# Altium PCB PCB-v1.PcbDoc
Units mm, origin at the board's own origin, x right, y up, seen from the top; angles counter-clockwise.
Board outline 100 x 100 mm, 2 copper layers (Top Layer, Bottom Layer); 9 components, 4 nets, 15 pads, 0 vias.
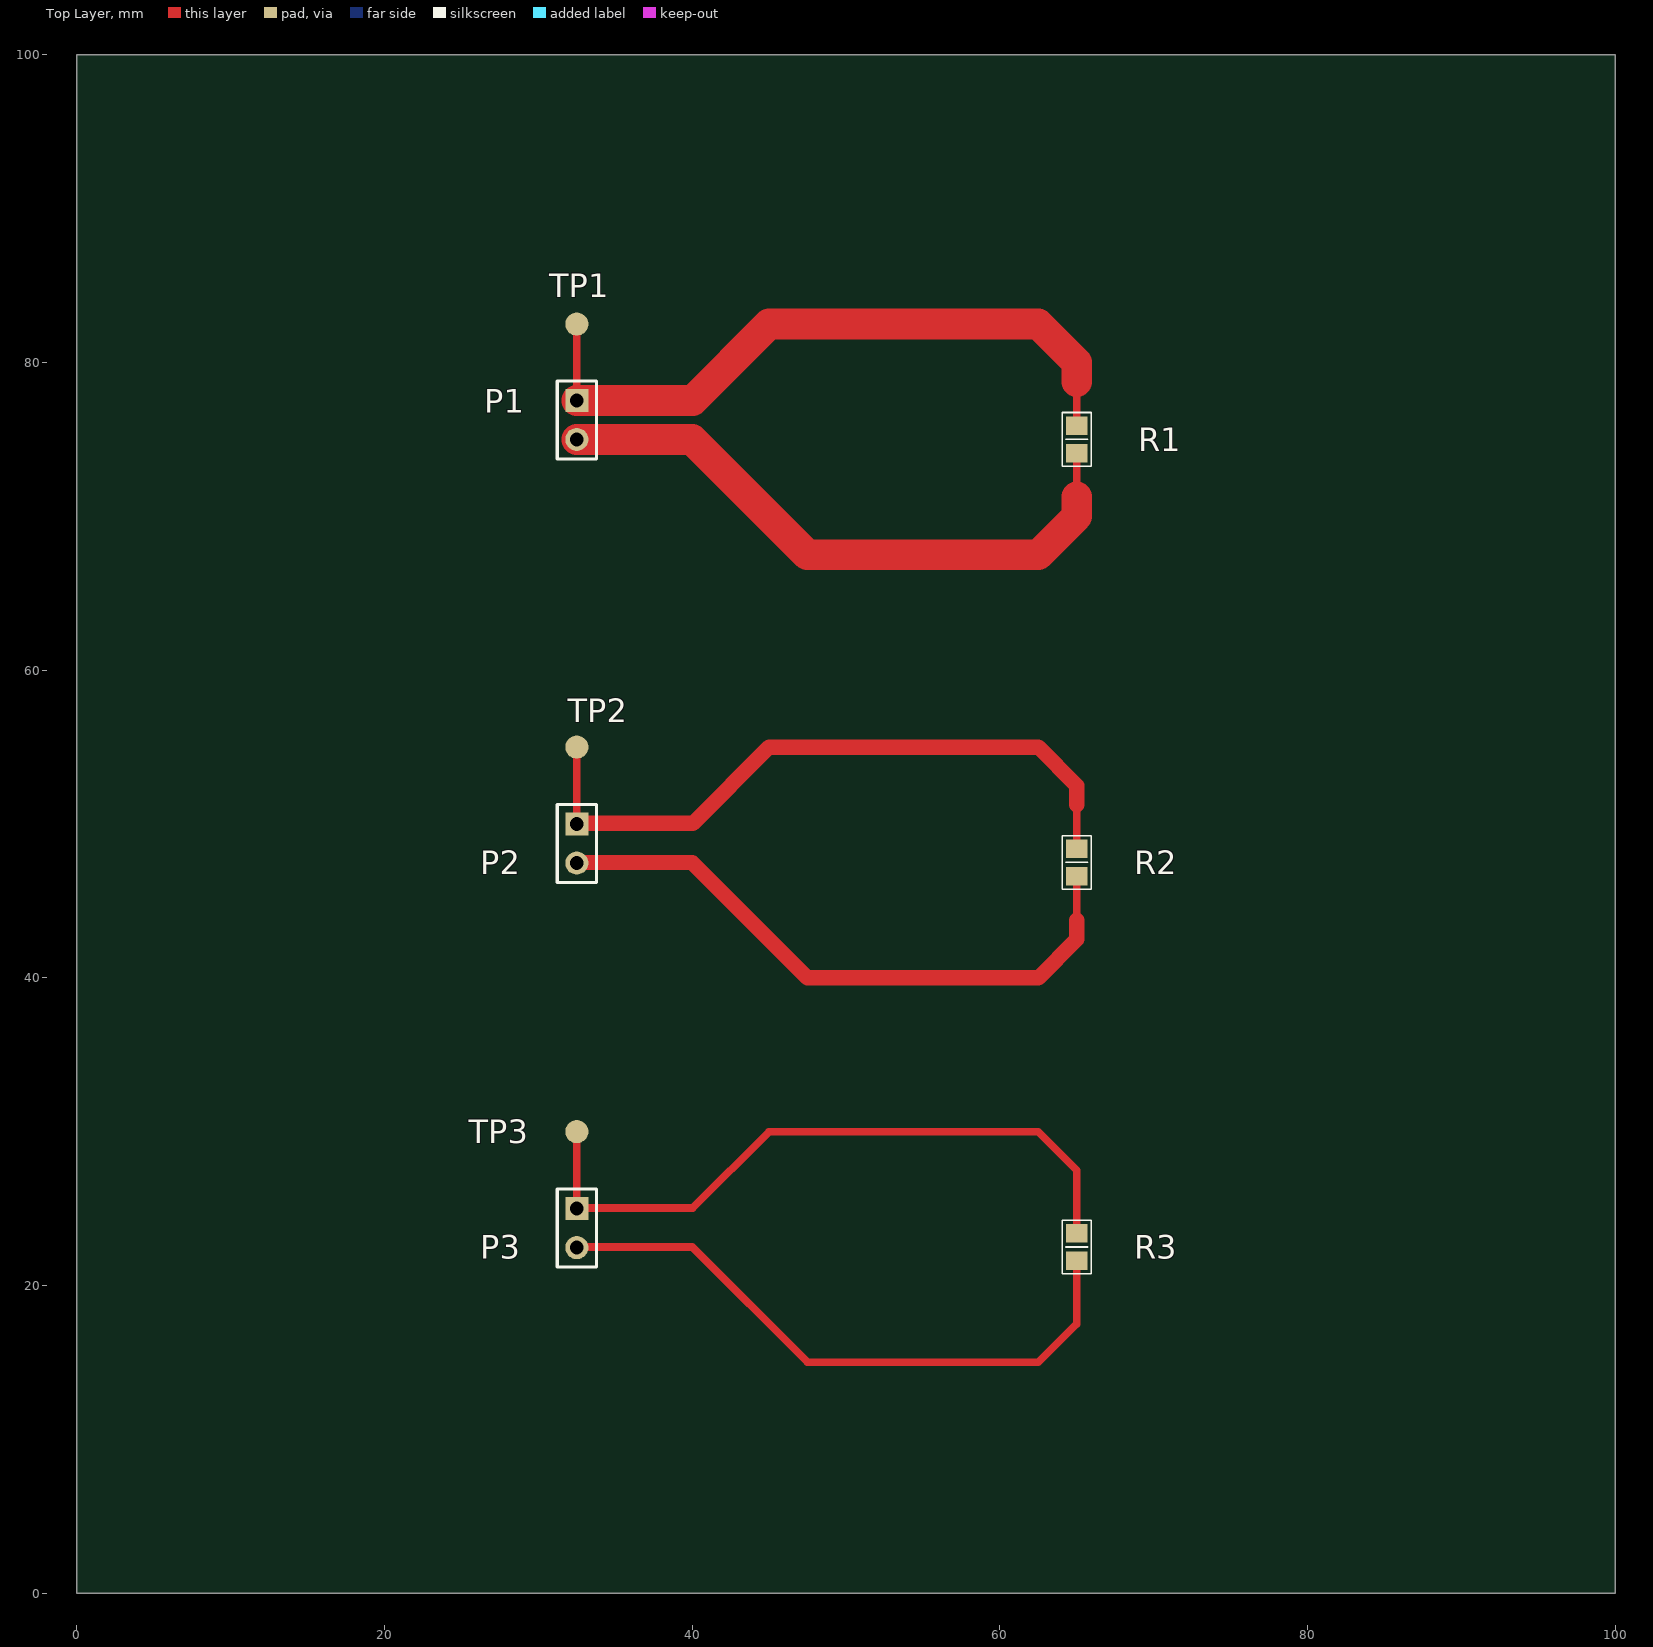
[diagram p0: Top Layer view]
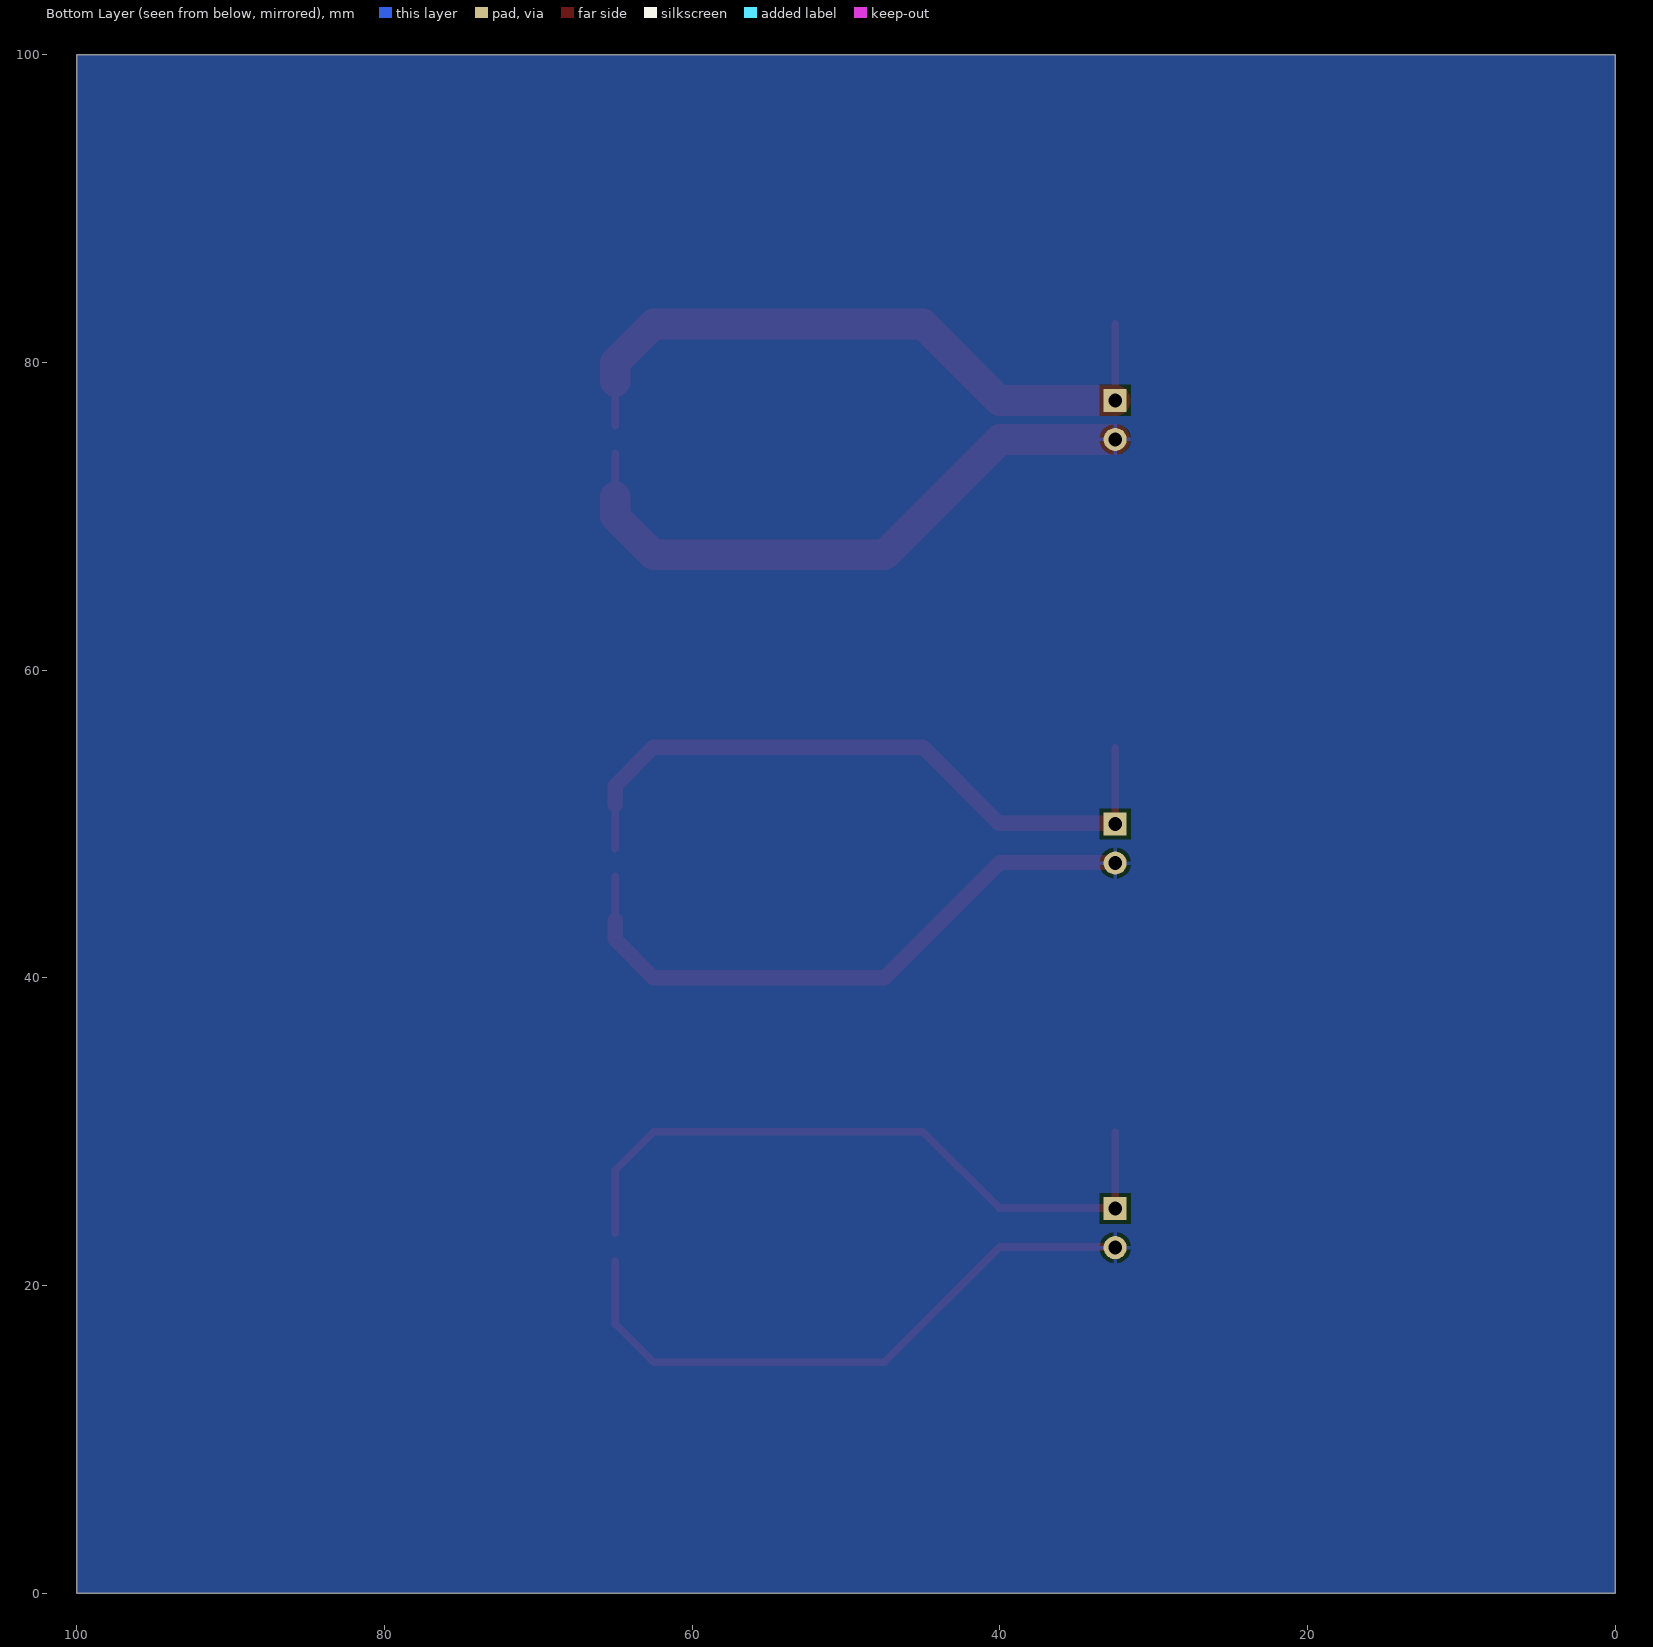
[diagram p1: Bottom Layer view, seen from below]
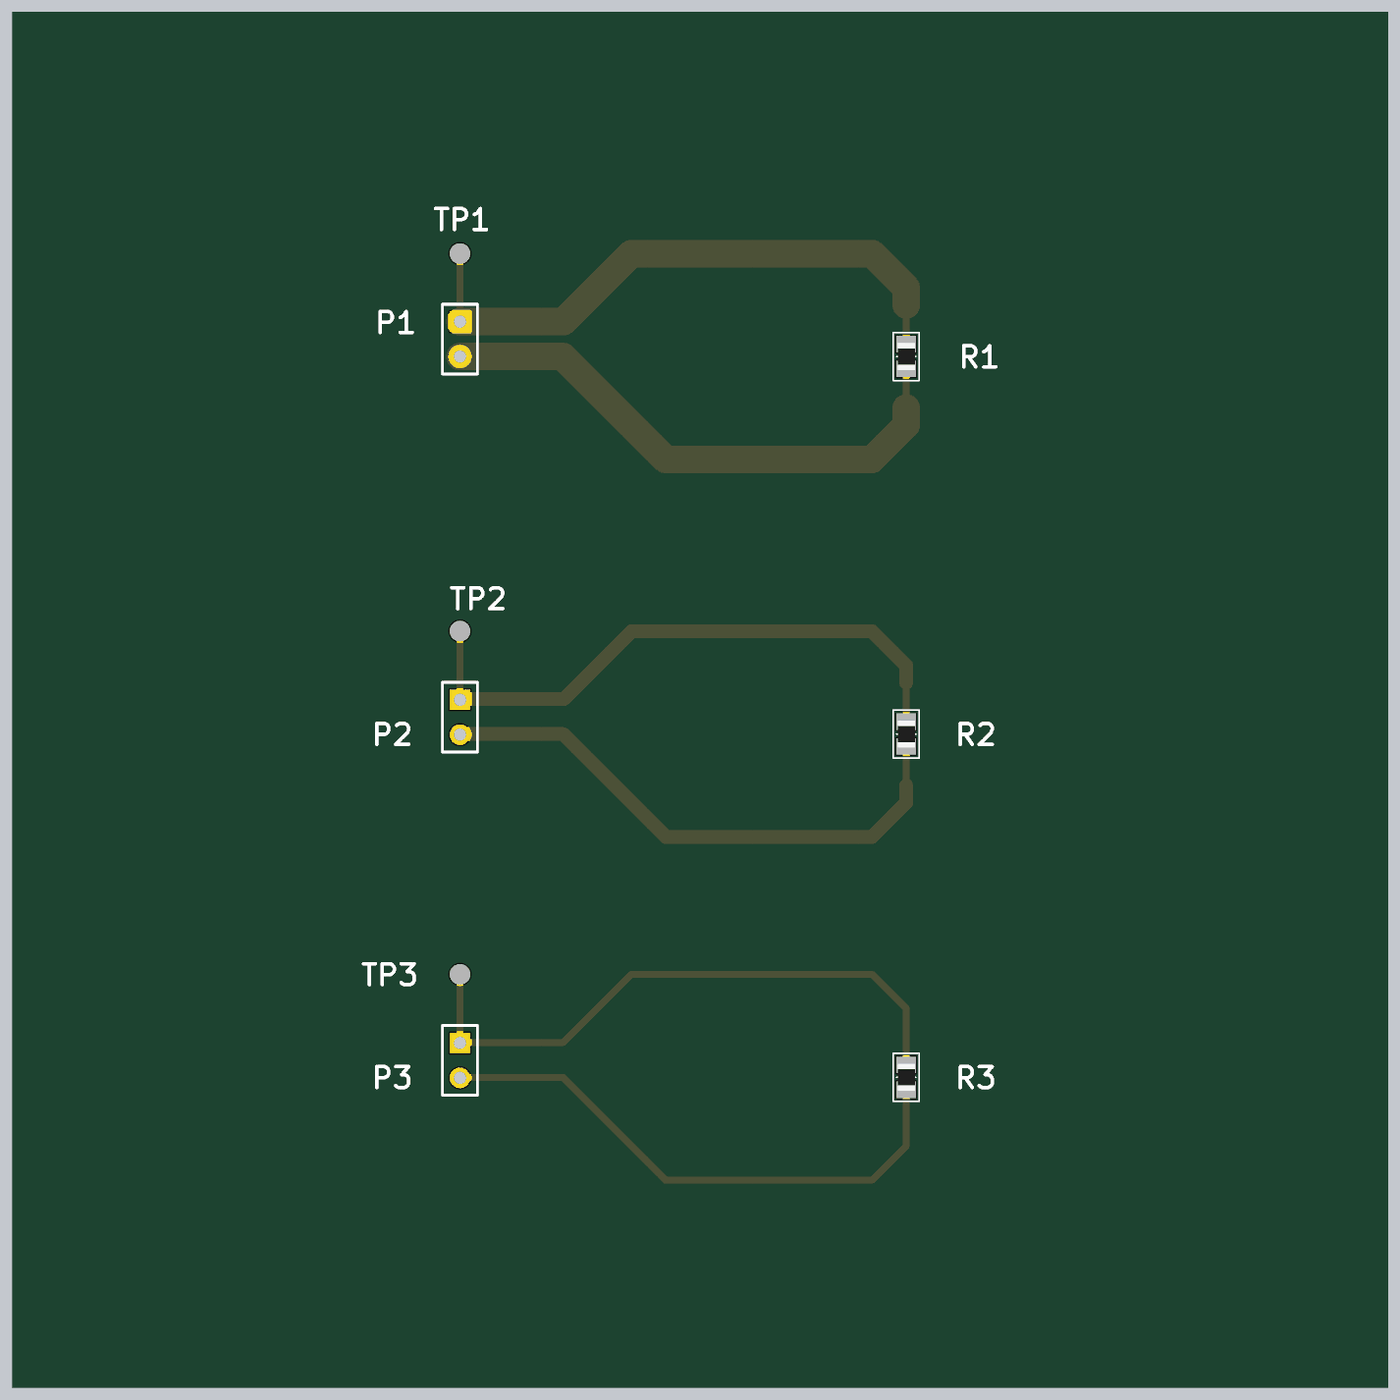
[diagram p2: 3D render of the assembled board from above, using the file's embedded part models]

## Layer stack, top to bottom
Top Solder: solder mask 0.0102, Solder Resist, Dk 3.5
Top Layer: signal copper 0.0356
Dielectric 1: dielectric 0.32, FR-4, Dk 4.8
Bottom Layer: signal copper 0.0356
Bottom Solder: solder mask 0.0102, Solder Resist, Dk 3.5

## Board outline
0,0 100,0 100,100 0,100

## Design rules (kind name [scope] priority, off if disabled: settings)
Clearance [All] p1: gap=0.254 ignorepadtopadclearanceinfootprint=FALSE
PolygonConnect [All] p1: connectstyle=Relief reliefconductorwidth=0.254 reliefentries=4 polygonreliefangle="90 Angle" airgapwidth=0.254
RoutingVias [All] p1: holewidth=0.711 width=1.27 viastyle="Through Hole" minholewidth=0.711 minwidth=1.27 maxholewidth=0.711 maxwidth=1.27
SolderMaskExpansion [All] p1: expansion=0.102 istentingtop=FALSE
SupplyNets "Schematic Supply Nets" [InNet('GND')] p1: voltage=0.000
Width [All] p1: maxlimit=2 minlimit=0.2 preferedwidth=0.5
30 further rules are at their usual default settings.

## Components (designator, comment, footprint, x,y, rotation, side; value= is the part's Value field where it differs from the comment)
P1 "Header 2" HDR1X2 32.5,77.54 r270 top
P2 "Header 2" HDR1X2 32.5,50 r270 top
P3 "Header 2" HDR1X2 32.5,25 r270 top
R1 "10R" 0805[2012] 65,75 r90 top
R2 "10R" 0805[2012] 65,47.5 r90 top
R3 "10R" 0805[2012] 65,22.5 r90 top
TP1 "Single Pin Test Point" testpoint_SMD 32.5,82.5 r270 top
TP2 "Single Pin Test Point" testpoint_SMD 32.5,55 r270 top
TP3 "Single Pin Test Point" testpoint_SMD 32.5,30 r270 top

## Footprints (in the part's own frame and the unit in brackets; to place one, negate y for a bottom-side part, rotate by r counter-clockwise, add the part's x,y. Pads: shape width x height; smd on the part's side, far side on the other; paste and mask are expansions set on the pad)
0805[2012] [mm] "Chip Resistor, Body 2.0x1.2mm, IPC Medium Density"
  rect 1.2x1.4 smd: 1(-0.9,0) 2(0.9,0)
  silkscreen extent -1.75,-0.95 1.75,0.95, body extent -1,-0.63 1,0.62, height 0.5
HDR1X2 [mm] "Connector; Header; 2 Position"
  rect 1.5x1.5 hole 0.9: 1(0,0)
  round 1.5 hole 0.9: 2(2.54,0)
  silkscreen extent -1.27,-1.27 3.81,1.27
testpoint_SMD [mm]
  round 1.5 smd: 0(0,0)

## Part data
P1 P2 P3: "Header, 2-Pin", LatestRevisionDate=17-Jul-2002, LatestRevisionNote="Re-released for DXP Platform.", Publisher="Altium Limited"
R1 R2 R3: library part Res, "Resistor", ComponentLink1Description=Datasheet, ComponentLink2Description=SupplierLink
TP1 TP2 TP3: library part Testpoint, ComponentLink1Description=Datasheet, ComponentLink2Description=SupplierLink

## Nets (pads, with @x,y where several pads share a name; then routed paths per layer and width w, separated by ;. In a path a pad name is that pad's centre, name@x,y a point inside that pad or via, vN(x,y) a via of type N, cw(c..) or ccw(c..) an arc to the next point about the centre after c; other vN are vias at no path point)
GND: P1.2 P2.2 P3.2 R1.1 R2.1 R3.1 | length 122.2
  Top Layer w0.5: P3.2@32.5,22.5 40,22.5 47.5,15 62.5,15 65,17.5 65,18.75 R3.1 ; 65,43.75 R2.1 ; 65,71.25 R1.1
  Top Layer w1: P2.2@32.5,47.5 40,47.5 47.5,40 62.5,40 65,42.5 65,43.75
  Top Layer w2: P1.2 40,75 47.5,67.5 62.5,67.5 65,70 65,71.25
NetP1_1: P1.1 R1.2 TP1.0 | length 44.7
  Top Layer w0.5: P1.1 TP1.0 ; R1.2 65,78.75
  Top Layer w2: P1.1 40.04,77.54 45,82.5 62.5,82.5 65,80 65,78.75
NetP2_1: P2.1 R2.2 TP2.0 | length 44.7
  Top Layer w0.5: P2.1 TP2.0@32.5,54.96 ; R2.2 65,51.25
  Top Layer w1: P2.1@32.5,50.04 40.04,50.04 45,55 62.5,55 65,52.5 65,51.25
NetP3_1: P3.1 R3.2 TP3.0 | length 44.7
  Top Layer w0.5: P3.1 TP3.0@32.5,29.96 ; P3.1@32.5,25.04 40.04,25.04 45,30 62.5,30 65,27.5 65,26.25 R3.2

## Polygon pours and split planes (outlines as drawn)
GND on Bottom Layer "NONET_L-01_P-001" (solid, pour order 0): 0,100 100,100 100,0 0,0

## Silkscreen, mask and mechanical layers (free items; w line width, h text height)
Board Shape:
  the board outline again, w0.2